# Altium PCB OTTO_ESP32.PcbDoc
Units mil, origin at the board's own origin, x right, y up, seen from the top; angles counter-clockwise.
Board outline 2257.6 x 1417.32 mil, 2 copper layers (Top1, Bottom2), stack 40.202 mil thick; 51 components, 58 nets, 224 pads, 80 vias.
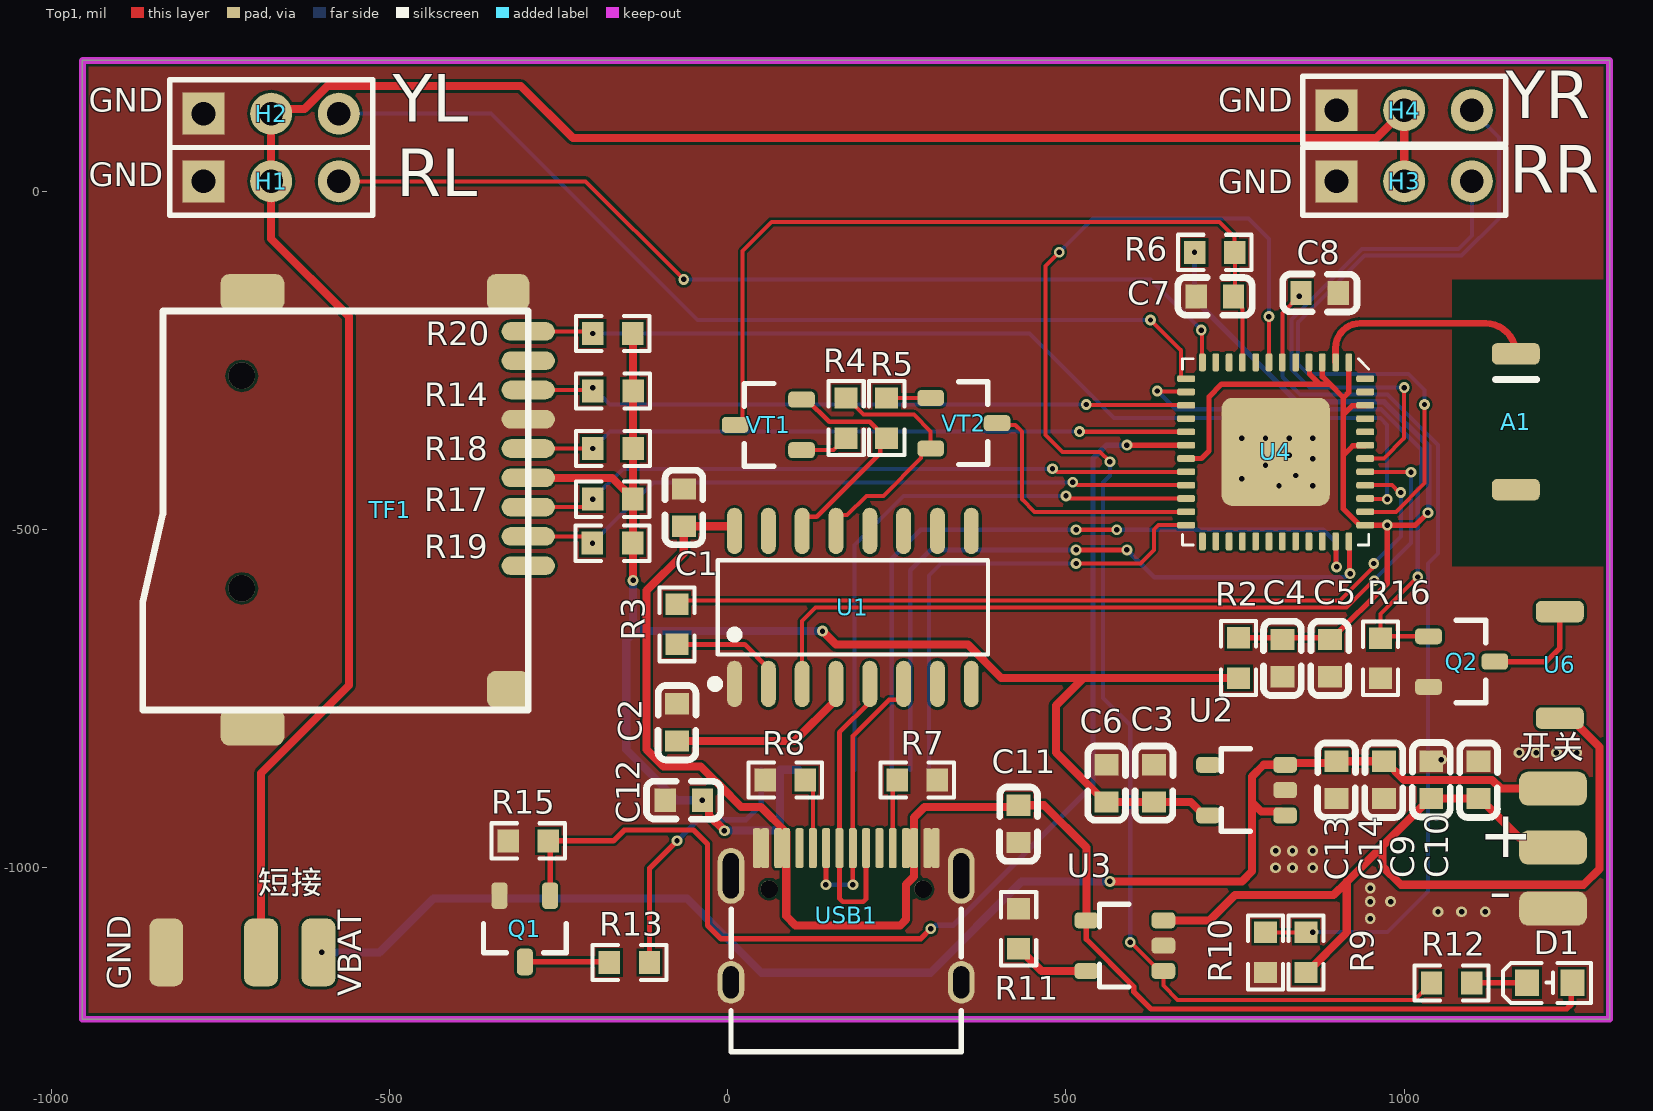
[diagram p0: Top1 view]
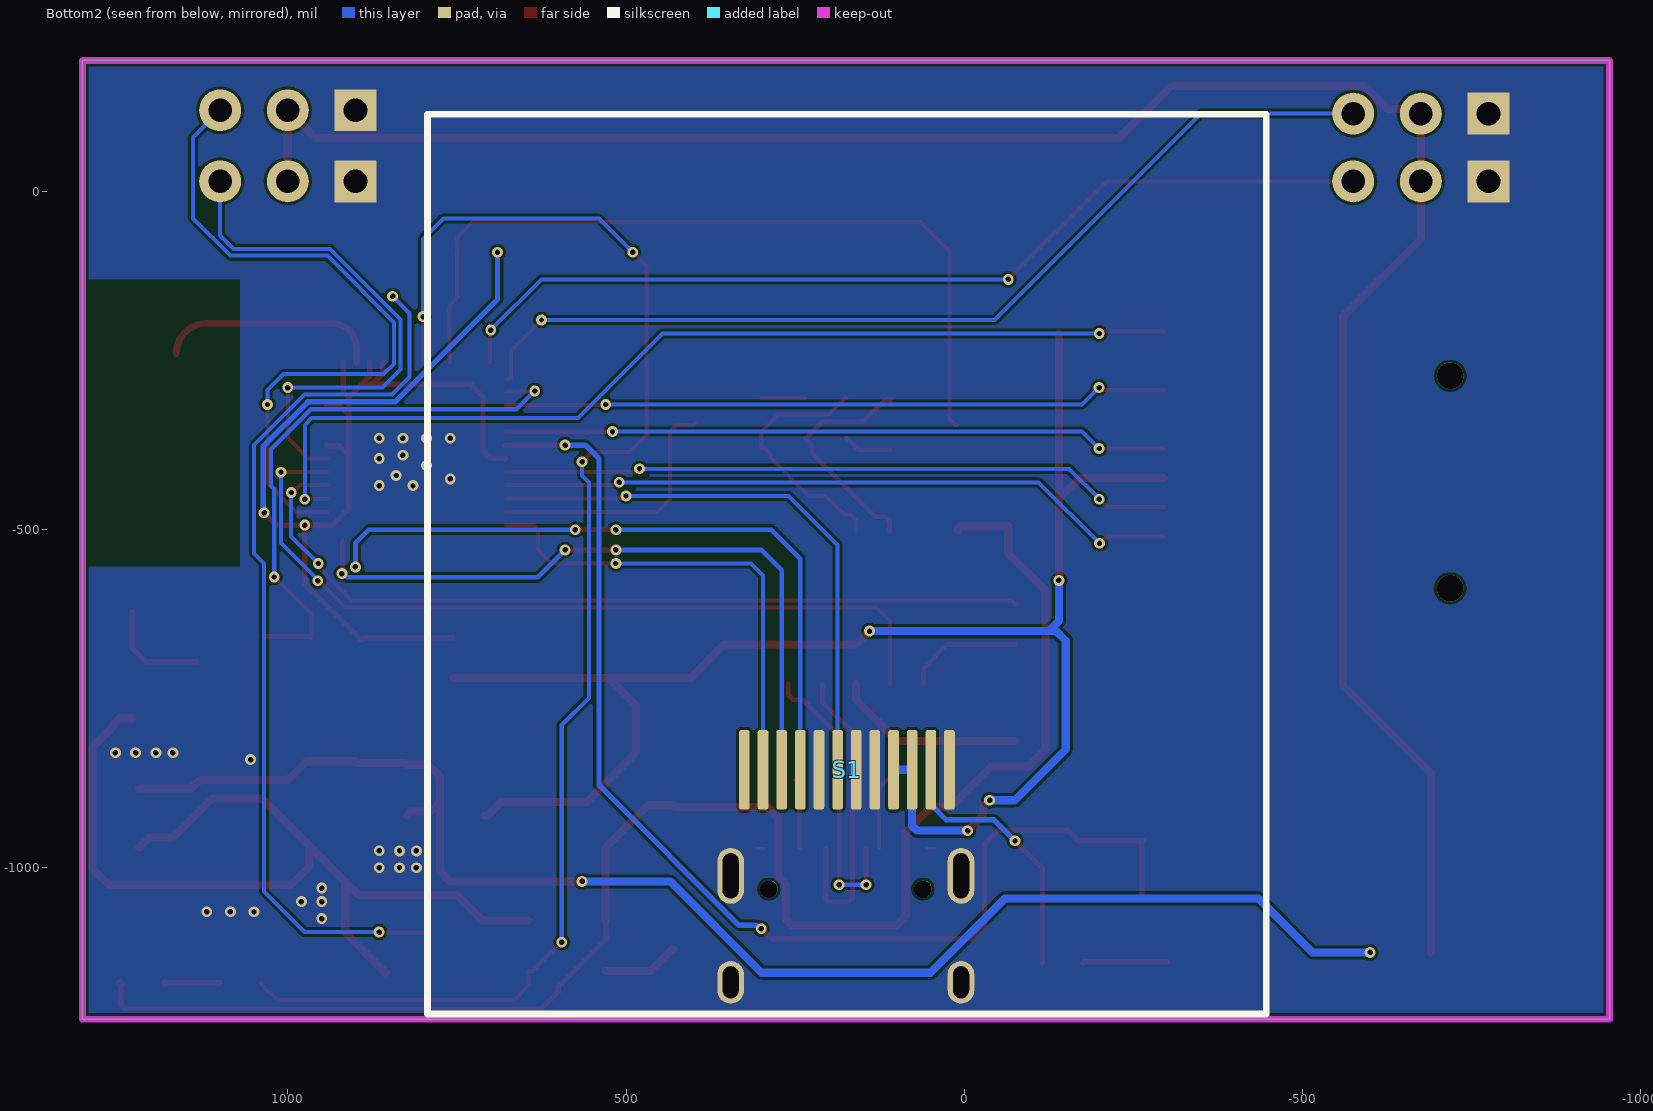
[diagram p1: Bottom2 view, seen from below]
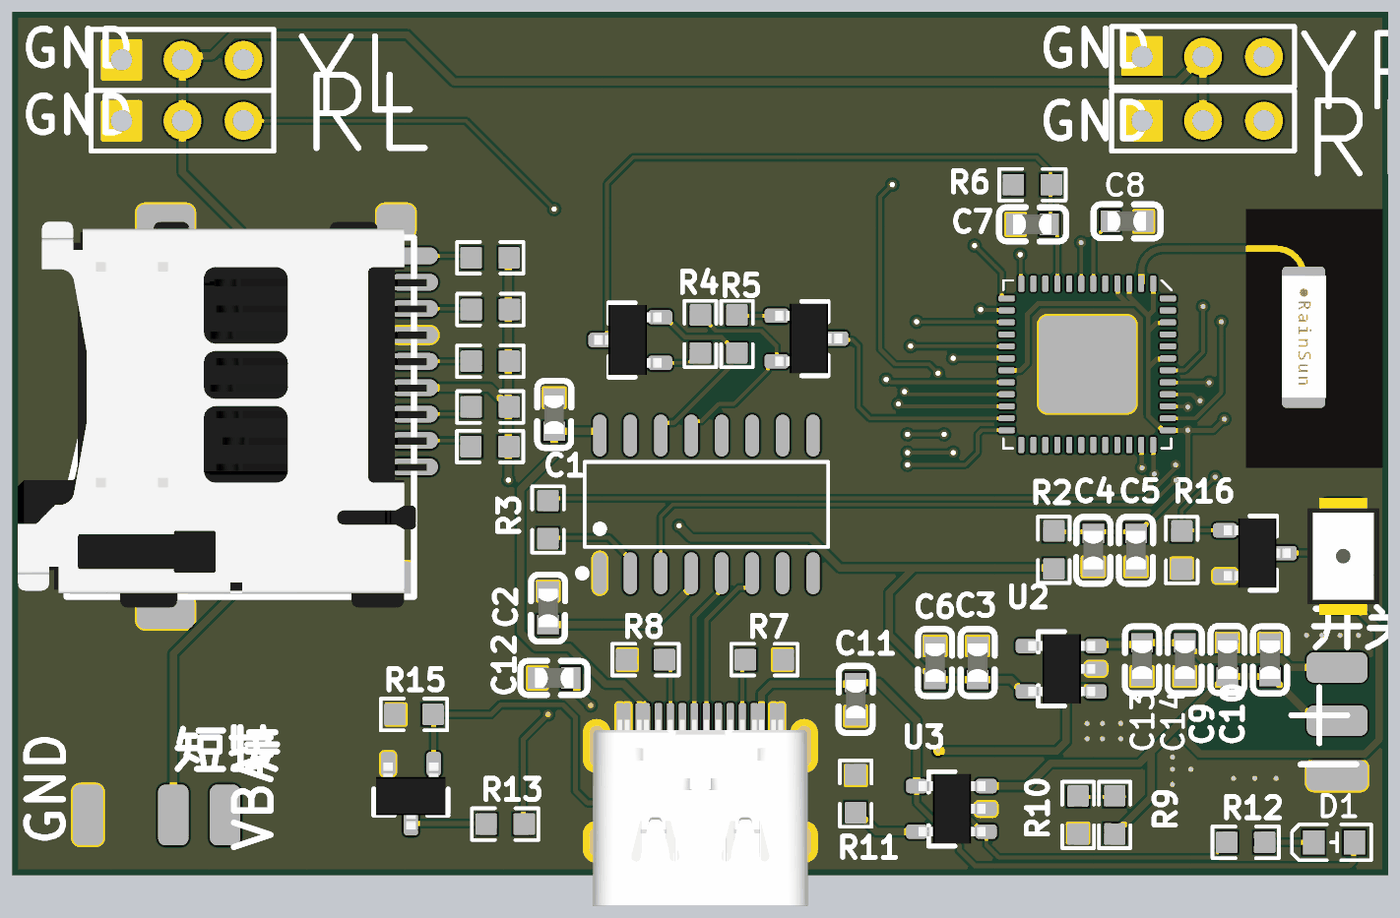
[diagram p2: 3D render of the assembled board from above, using the file's embedded part models]

## Layer stack, top to bottom
Top Solder: solder mask 0.4, Solder Resist, Dk 3.5
Top1: signal copper 1.4
Dielectric 1: core 37.4016, FR-4, Dk 4.2
Bottom2: signal copper 1.4
Bottom Solder: solder mask 0.4, Solder Resist, Dk 3.5

## Board outline
-954.01,-1223.65 -954.01,193.67 1303.59,193.67 1303.59,-1223.65

## Design rules (kind name [scope] priority, off if disabled: settings)
Clearance [All] p1: gap=4 ignorepadtopadclearanceinfootprint=FALSE
ComponentClearance [All] p1: gap=0 collisioncheckmode=3 verticalgap=0 showdistances=FALSE
DiffPairsRouting [All] p1: maxlimit=9 minlimit=9 mostfreqgap=9 toplayer_minwidth=4 toplayer_maxwidth=4 toplayer_prefwidth=4 bottomlayer_minwidth=4 bottomlayer_maxwidth=4 bottomlayer_prefwidth=4 maxuncoupledlength=500
FanoutControl Fanout_BGA [All] p1: bgadir=Out bgaviamode=Centered fanoutstyle=Auto fanoutdirection=Alternating viagrid=1 // Fanout_BGA (Default Rule)
HoleSize [All] p1: absolutevalues=TRUE maxlimit=10000 minlimit=8 maxpercent=80.000 minpercent=20.000
MinimumSolderMaskSliver [All] p1 off: minsoldermaskwidth=2
PlaneClearance [All] p1: clearance=8
PlaneConnect [All] p1: planeconnectstyle=Direct reliefexpansion=20 reliefentries=4 reliefconductorwidth=10 reliefairgap=10
PolygonConnect [All] p1: connectstyle=Direct reliefconductorwidth=10 reliefentries=4 polygonreliefangle="90 Angle" airgapwidth=10
RoutingVias [All] p1: holewidth=8 width=16 viastyle="Through Hole" minholewidth=6 minwidth=12 maxholewidth=28 maxwidth=50
SilkToBoardRegionClearance [All] p1 off:
SilkToSilkClearance [All] p1: silktosilkclearance=0
SilkToSolderMaskClearance [IsPad] p1: minsilkscreentomaskgap=0 clearancetoexposedcopper=TRUE
SolderMaskExpansion [All] p1: expansion=3 istentingtop=FALSE
Width [All] p1: maxlimit=10000 minlimit=4 preferedwidth=4
20 further rules are at their usual default settings.

## Components (designator, comment, footprint, x,y, rotation, side; value= is the part's Value field where it differs from the comment)
A1 "RAINSUN" ANT-Rainsun-AN5120 1165,-340 r270 top
C1 "0.1uF" C0603 -65,-467.44 r270 top value=0.1u
C2 "0.1uF" C0603 -75,-785 r90 top value=0.1u
C3 "0.1uF" C0603 630,-875 r270 top value=0.1u
C4 "10uF" C0603 820,-690 r90 top value=0.1u
C5 "0.1uF" C0603 890,-690 r90 top value=0.1u
C6 "10uF" C0603 560,-875 r270 top value=0.1u
C7 "1uF" C0603 720,-155 r180 top value=0.1u
C8 "0.1uF" C0603 875,-150 r180 top value=0.1u
C9 "4.7UF" C0603 1040,-870 r270 top
C10 "104" C0603 1110,-870 r90 top
C11 "4.7UF" C0603 430,-935 r90 top
C12 "0.1uF" C0603 -65,-900 r0 top value=0.1u
C13 "0.1uF" C0603 900,-870 r90 top value=0.1u
C14 "10uF" C0603 970,-870 r90 top value=0.1u
D1 "red" LED0603 1215,-1170 r180 top
H1 "GP26-2520WV-3P" PIN2.54_1*3 -675,15 r0 top
H2 "GP26-2520WV-3P" PIN2.54_1*3 -675,115 r0 top
H3 "GP26-2520WV-3P" PIN2.54_1*3 1000,15 r0 top
H4 "GP26-2520WV-3P" PIN2.54_1*3 1000,120 r0 top
Q1 "AO3400A" SOT23-3 -300,-1090 r270 top
Q2 "AO3400A" SOT23-3 1085,-695 r0 top
R2 "0R" R0603 755,-689.65 r90 top value=22R
R3 "200R" R0603 -75,-640 r270 top value=22R
R4 "12K" R0603 175,-335 r270 top value=22R
R5 "12K" R0603 235,-335 r90 top value=22R
R6 "10K" R0603 720,-90 r0 top value=22R
R7 "5.1K" R0603 280,-870 r0 top value=22R
R8 "5.1K" R0603 85,-870 r180 top value=22R
R9 "100K" R0603 855,-1125 r270 top value=22R
R10 "100K" R0603 795,-1125 r90 top value=22R
R11 "2K" R0603 430,-1090 r270 top
R12 "1K" R0603 1070,-1170 r0 top
R13 "10R" R0603 -145.34,-1140 r0 top value=22R
R14 "10K" R0603 -169.65,-295 r180 top value=22R
R15 "10K" R0603 -295,-960 r0 top value=22R
R16 "10K" R0603 965,-690 r90 top value=22R
R17 "10K" R0603 -170,-455 r180 top value=22R
R18 "10K" R0603 -169.65,-380 r180 top value=22R
R19 "10K" R0603 -170.34,-520 r180 top value=22R
R20 "10K" R0603 -170,-210 r180 top value=22R
S1 "LCD-240x240" LCD-240x240-FlUSH-154 173.45,-545.94 r180 bottom locked
TF1 "TF" TF-SOCKET -623,-733.69 r180 top
U1 "CH340C" SOP-16_L10.0-W3.9-P1.27-LS6.0-BL 185,-615 r0 top
U2 "XC6210B332MR 3.3" SOT23-5 765,-885 r180 top
U3 "MCP73831" SOT23-5 585,-1115 r180 top
U4 "ESP32_SIP" QFN-48_7X7 810,-385 r270 top
U6 "DET402" DET402 1230,-700 r90 top
USB1 "Type-C" Type-C-TOP 175,-1070 r270 top locked
VT1 "S8050" SOT23-3 60,-345 r180 top
VT2 "S8050" SOT23-3 349.06,-342.6 r0 top

## Footprints (in the part's own frame and the unit in brackets; to place one, negate y for a bottom-side part, rotate by r counter-clockwise, add the part's x,y. Pads: shape width x height; smd on the part's side, far side on the other; paste and mask are expansions set on the pad)
ANT-Rainsun-AN5120 [mm] "选择焊盘"
  rrect50% 0.8x1.8 smd: 1(-2.54,0) ""(2.563,0)
  silkscreen extent -1.57,-0.76 -1.57,0.79, body extent -2.57,-0.91 2.54,0.94, height 1.32
C0603 [mm]
  rect 0.8x0.9 smd: 1(-0.7,0) 2(0.7,0)
  silkscreen extent -1.41,-0.71 1.39,0.72, body extent -0.8,-0.41 0.8,0.41, height 0.9
DET402 [mm]
  rrect50% 0.8x1.8 smd: 1(-2,0) 2(2,0)
  body extent -2.45,-1.5 2.44,1.5, height 2.03
LCD-240x240-FlUSH-154 [mm]
  rrect50% 0.4x3 smd: 1(3.851,-7.85) 2(3.151,-7.85) 3(2.451,-7.85) 4(1.751,-7.85) 5(1.051,-7.85) 6(0.351,-7.85) 7(-0.349,-7.85) 8(-1.049,-7.85) 9(-1.749,-7.85) 10(-2.449,-7.85) 11(-3.149,-7.85) 12(-3.849,-7.85)
  silkscreen extent -15.75,-17.02 15.75,16.76, body extent -15.7,-17.02 15.7,16.76
LED0603 [mm]
  rect 0.9x1 smd: 1(-0.85,0) 2(0.85,0)
  silkscreen extent -1.55,-0.75 1.75,0.75, body extent -0.84,-0.37 0.81,0.36, height 0.68
PIN2.54_1*3 [mil]
  rect 62x62 hole 35: 1(-100,0)
  round 62 hole 35: 2(0,0) 3(100,0)
  silkscreen extent -150,-50 150,50
QFN-48_7X7 [mm]
  rrect50% 0.675x0.25 smd: 1(-3.363,2.75) 2(-3.363,2.25) 3(-3.363,1.75) 4(-3.363,1.25) 5(-3.363,0.75) 6(-3.363,0.25) 7(-3.363,-0.25) 8(-3.363,-0.75) 9(-3.363,-1.25) 10(-3.363,-1.75) 11(-3.363,-2.25) 12(-3.363,-2.75) 25(3.363,-2.75) 26(3.363,-2.25) 27(3.363,-1.75) 28(3.363,-1.25) 29(3.363,-0.75) 30(3.363,-0.25) 31(3.363,0.25) 32(3.363,0.75) 33(3.363,1.25) 34(3.363,1.75) 35(3.363,2.25) 36(3.363,2.75)
  rrect50% 0.25x0.675 smd: 13(-2.75,-3.363) 14(-2.25,-3.363) 15(-1.75,-3.363) 16(-1.25,-3.363) 17(-0.75,-3.363) 18(-0.25,-3.363) 19(0.25,-3.363) 20(0.75,-3.363) 21(1.25,-3.363) 22(1.75,-3.363) 23(2.25,-3.363) 24(2.75,-3.363) 37(2.75,3.363) 38(2.25,3.363) 39(1.75,3.363) 40(1.25,3.363) 41(0.75,3.363) 42(0.25,3.363) 43(-0.25,3.363) 44(-0.75,3.363) 45(-1.25,3.363) 46(-1.75,3.363) 47(-2.25,3.363) 48(-2.75,3.363)
  rrect20% 4.064x4.064 smd: 49(0,0)
  silkscreen extent -3.5,-3.5 3.5,3.5, body extent -3.5,-3.5 3.5,3.5, height 1
R0603 [mil]
  rect 31.75x34.02 smd: 1(-29.66,0) 2(29.65,0)
  silkscreen extent -55,-26 55,26, body extent -31,-17 31,17, height 19
SOP-16_L10.0-W3.9-P1.27-LS6.0-BL [mm]
  oval 0.56x1.745 smd: 1(-4.445,-2.873) 2(-3.175,-2.873) 3(-1.905,-2.873) 4(-0.635,-2.873) 5(0.635,-2.873) 6(1.905,-2.873) 7(3.175,-2.873) 8(4.445,-2.873) 9(4.445,2.873) 10(3.175,2.873) 11(1.905,2.873) 12(0.635,2.873) 13(-0.635,2.873) 14(-1.905,2.873) 15(-3.175,2.873) 16(-4.445,2.873)
  silkscreen extent -5.33,-3.02 5.08,1.77, body extent -5.02,-3.12 4.97,3.11, height 1.58
SOT23-3 [mm] "SOT23, 3-Leads, Body 3.1x3.0mm (max), Pitch 0.95mm, IPC Medium Density"
  rrect50% 1x0.6 smd: 1(-1.246,0.95) 2(-1.246,-0.95) 3(1.246,0)
  silkscreen extent -0.2,-1.55 0.9,1.55, body extent -1.3,-1.45 1.5,1.45, height 1.2
SOT23-5 [mm] "SOT23, 3-Leads, Body 3.1x3.0mm (max), Pitch 0.95mm, IPC Medium Density"
  rrect50% 0.889x0.6 smd: 1(-1.5,0.95) 2(-1.5,0) 3(-1.5,-0.95) 4(1.396,-0.95) 5(1.396,0.95)
  silkscreen extent -0.2,-1.55 0.9,1.55, body extent -1.48,-1.45 1.32,1.45, height 1.2
TF-SOCKET [mm]
  oval 2x0.7 smd: 1(-8.331,-4.582) 2(-8.331,-5.682) 3(-8.331,-6.782) 4(-8.331,-7.882) 5(-8.331,-8.982) 6(-8.331,-10.082) 7(-8.331,-11.182) 8(-8.331,-12.282) 9(-8.331,-13.382)
  rrect50% 1.6x1.4 smd: 10(-7.577,0.068) 10(-7.577,-14.836)
  rrect50% 2.4x1.4 smd: 10(2.023,1.476) 10(2.023,-14.836)
  silkscreen extent -8.33,-14.15 6.15,0.84, body extent -8.87,-14.81 8.18,1.29, height 2.05
Type-C-TOP [mm]
  round 0.65 hole 0.65: 0(-0.98,2.89) 0(-0.98,-2.89)
  oval 1.6x1 hole 0.6 slot 1.2 at 0 deg: 1(2.52,4.325) 2(2.52,-4.325)
  oval 2.1x1 hole 0.6 slot 1.7 at 0 deg: 3(-1.48,-4.325) 4(-1.48,4.325)
  rrect50% 1.5x0.3 smd: A1(-2.52,-3.35) A4(-2.52,-2.55) A5(-2.52,-1.25) A6(-2.52,-0.25) A7(-2.52,0.25) A8(-2.52,1.25) A9(-2.52,2.55) A12(-2.52,3.35) B1(-2.52,3.05) B4(-2.52,2.25) B5(-2.52,1.75) B6(-2.52,0.75) B7(-2.52,-0.75) B8(-2.52,-1.75) B9(-2.52,-2.25) B12(-2.52,-3.05)
  silkscreen extent -0.22,-4.33 5.12,4.33, body extent -2.57,-4.48 5.18,4.48, height 3.26

## Part data
A1: library part ANT-Rainsun-AP5120
C1 C2 C3 C4 C5 C6 C7 C12 C13 C14: library part 电容-0402, "Capacitor"
C8: "Capacitor"
C9 C10 C11: library part cap, U=50V, 参数=Cap,0805,X7R,104K,50V,125C,±10%
  C9 C11: C=4.7UF
  C10: C=104
D1: library part LED, 参数=LED,0603,Red
H1 H2 H3 H4: BOM_JLCPCB Part Class="Extended Part", BOM_Manufacturer=GEPU(歌普), BOM_Manufacturer Part=GP26-2520WV-3P, BOM_Supplier=LCSC, BOM_Supplier Part=C2681738, Contributor=LCSC, spicePre=H, spiceSymbolName=GP26-2520WV-3P
Q1 Q2: "N-MOS"
R2 R3 R4 R5 R6 R7 R8 R9 R10 R13 R14 R15 R16 R17 R18 R19 R20: "Resistor"
S1: "显示屏"
TF1: library part TF卡座, "8脚自弹"
U1: BOM_JLCPCB Part Class="Extended Part", BOM_Manufacturer=WCH, BOM_Manufacturer Part=CH340C, BOM_Supplier=LCSC, BOM_Supplier Part=C84681, spicePre=U, spiceSymbolName=CH340C
U2: library part LP2992, "LDO"
U3: "线性充电管理控制器"
U4: library part ESP32-PICO
USB1: library part USB-Type-C-TOP
VT1 VT2: library part SMT_TRIODE_NPN, "Surface mount NPN transistor, package SOT-23"
R11: P=1/8W, R=2K, 参数=Res,0805,0R,±1%,1/8W,100ppm,155C
R12: P=1/8W, R=1K, 参数=Res,0805,0R,±1%,1/8W,100ppm,155C

## Free pads (board coordinates)
  rrect50% 50x100 smd: ""(-830,-1125) ""(-690,-1125) ""(-605,-1125)
  rrect50% 100x50 smd: ""(1219.94,-882.79) ""(1220,-1060) ""(1220,-970)

## Via types
v1: diameter 16, hole 8, Top1 to Bottom2, tented both sides, 74 vias
v2: diameter 16, hole 8, Top1 to Bottom2, 4 vias
v3: diameter 39.37, hole 39.37, Top1 to Bottom2, 2 vias

## Nets (pads, with @x,y where several pads share a name; then routed paths per layer and width w, separated by ;. In a path a pad name is that pad's centre, name@x,y a point inside that pad or via, vN(x,y) a via of type N, cw(c..) or ccw(c..) an arc to the next point about the centre after c; other vN are vias at no path point)
3V3A: C4.2 C5.2 R2.2 R6.1 U4.1 U4.3 U4.4 U4.19 U4.37 U4.43 U4.46 | length 1797
  Top1 w8: U4.19 700,-394.84 711.39,-383.45 711.39,-303.61 730,-285 875,-285 ; v1(690,-90) R6.1 ; R2.2 887.55,-660 C5.2 891.97,-662.44 975,-579.41 v1@975,-499.69 ; U4.4 860,-253.41 860,-270 875,-285 ; U4.3 878.9,-273.9 890,-285 ; U4.1 918.27,-296.73 910,-305 ; 927.22,-486.5 910,-469.28 910,-390 ; 927.25,-486.5 934.02,-493.27 U4.37 968.58,-493.27 v1@975,-499.69 ; U4.43 941.46,-376.08 923.92,-376.08 910,-390 ; U4.46 941.46,-317.02 922.98,-317.02 910,-330 ; v1(1035,-475) 1016.73,-493.27 v1(975,-493.27) v1@975,-499.69 ; 875,-285 890,-285 ; 890,-285 910,-305 ; 910,-390 910,-330 ; 910,-330 910,-305
  Bottom2 w8: v1(690,-90) 690,-159.7 841.3,-311 970.44,-311 1036,-376.56 1036,-474 v1(1035,-475)
+5: H1.2 H2.2 H3.2 H4.2 pad.@-690,-1125 | length 3187.3
  Top1 w12: pad.@-690,-1125 -690,-860.05 -560,-730.05 -560,-185 -675,-70 H1.2 H2.2 -668.02,121.98 -626,121.98 -591.98,156 -306,156 -229,79 959,79 H4.2 H3.2
BAT_DET: C8.2 R9.1 R10.2 U4.6 | length 1436.7
  Top1 w6: R10.2 R9.1 ; U4.6 819.84,-179.57 C8.2@844.71,-154.71 ; v1(845,-155) 847.45,-152.56 C8.2
  Bottom2 w6: v1(845,-155) 819.84,-180.16 819.84,-273.98 845.86,-300 975,-300 1050,-375 1050,-535 1035,-550 1035,-1035 975,-1095 v1(865,-1095)
BUZZ: Q2.1 R16.2 U4.14 | length 845
  Top1 w6: v1(635,-295) 635.71,-295.71 676.91,-295.71 U4.14 ; v1(1020,-570) 965,-625 R16.2 967.75,-657.6 Q2.1
  Bottom2 w6: v1(635,-295) 662,-322 965.89,-322 1025,-381.11 1025,-435.21 1020,-440.21 v1(1020,-570)
CHG_DET: R12.1 U3.1 U4.7 | length 2150.9
  Top1 w6: v1(490,-90) 470,-110 470,-360 495,-385 550.47,-385 v1(565,-399.53) ; v2(595,-1110) 595.96,-1110 638.37,-1152.4 U3.1 644.06,-1174.06 665,-1195 1015.35,-1195 1026.34,-1184.01 1027.47,-1184.01 1040.35,-1171.13 R12.1 ; v1(800,-185) 800.08,-185.08 U4.7 U4.7
  Bottom2 w6: v1(490,-90) 540,-40 770,-40 800,-70 v1(800,-185) ; v1(565,-399.53) 565,-420 555,-430 555,-748.65 595,-788.65 v2(595,-1110)
CP_Rx: U1.3 U4.41 | length 1214.3
  Top1 w6: U1.3 110,-635 130,-615 914.82,-615 954.21,-575.61 v1(955.61,-575.61) ; U4.41 942.62,-414.76 1009.76,-414.76 v1(1010,-415)
  Bottom2 w6: v1(955.61,-575.61) 955.61,-574.21 1010,-519.82 v1(1010,-415)
CP_Tx: R3.1 U4.40 | length 1236.6
  Top1 w6: R3.1 -69.65,-605 905,-605 953,-557 953,-551.91 v1(954.91,-550) ; U4.40 981.75,-434.21 992.53,-445 v1(995,-445)
  Bottom2 w6: v1(954.91,-550) 995,-509.91 v1(995,-445)
DTR: R4.1 U1.13 VT2.2 | length 374.9
  Top1 w6: U1.13 160,-486.05 167.41,-478.63 176.37,-478.63 205,-450 230,-450 285.62,-394.38 285.62,-388.59 294.21,-380 VT2.2 300,-355 275,-330 200.79,-330 176.13,-305.35 R4.1 R4.1@173.87,-305.35
EN: C7.1 R6.2 U4.9 VT1.3 | length 1209
  Top1 w6: VT1.3 13.13,-345 21.72,-336.41 21.72,-88.28 65,-45 726.78,-45 749.29,-67.51 749.29,-89.29 R6.2@750,-90 ; R6.2 749.66,-152.9 C7.1 760.3,-167.75 760.3,-172.75 760.79,-173.23 U4.9
FLASH_CLK: U4.31
FLASH_CS: U4.25
FLASH_SD0: U4.27
FLASH_SD1: U4.33
FLASH_SD2: U4.30
FLASH_SD3: U4.32
GND: C1.1 C2.2 C3.1 C4.1 C5.1 C6.1 C7.2 C8.1 C9.1 C10.2 C11.1 C12.1 C13.1 C14.1 H1.1 H2.1 H3.1 H4.1 pad.@1220,-1060 pad.@-830,-1125 Q1.2 Q2.2 R7.2 R8.2 R10.1 R11.1 R15.1 R16.1 S1.1 S1.5 S1.6 S1.8 TF1.6 TF1.10 U1.1 U2.2 U3.2 U4.49 USB1.1 USB1.2 USB1.3 USB1.4 USB1.A1 USB1.A12 USB1.B1 USB1.B12 | length 23.6
  Top1 w4: USB1.A1 USB1.B12 ; USB1.B1 USB1.A12
  other v1: 949.84,-1074.92 1049.92,-1064.92 1084.92,-1064.92 1119.92,-1064.92 949.92,-1049.92 979.92,-1049.92 949.84,-1029.92 809.92,-999.92 834.92,-999.92 864.92,-999.92 809.84,-974.92 834.84,-974.84 864.84,-974.76 1054.92,-839.92 1169.92,-829.92 1194.92,-829.84 1224.92,-829.92 1254.92,-829.84 814.92,-434.92 864.92,-434.92 759.92,-424.92 839.92,-419.92 794.92,-404.92 864.92,-394.92 829.92,-389.92 759.92,-364.92 794.92,-364.92 829.92,-364.92 864.92,-364.92
GPIO0: U4.23 VT2.3 | length 392.3
  Top1 w6: VT2.3 400.51,-345 425,-345 435,-355 435,-455 453.58,-473.58 U4.23
GPIO2: S1.7 U4.22 | length 854.4
  Top1 w6: v1(500,-450) 502.71,-450 506.6,-453.9 U4.22
  Bottom2 w6: S1.7 187.2,-522.8 260,-450 v1(500,-450)
GPIO4: S1.11 U4.24 | length 716
  Top1 w6: v1(515,-550) 610,-550 630,-530 630,-500 636.73,-493.27 U4.24
  Bottom2 w6: S1.11 297.44,-567.56 315,-550 v1@510,-550 ; v1@510.01,-550.01 v1(515,-550)
GPIO5: U4.34
GPIO9: U4.28
GPIO10: U4.29
GPIO12: Q1.1 R15.2 U4.18 | length 1753.9
  Top1 w6: R15.2 R15.2@-262.6,-962.75
  Top1 w8: R15.2 -168.92,-960 -152.92,-944 -51,-944 -30,-965 -30,-1085 -10,-1105 285,-1105 v1(300,-1090) ; Q1.1 R15.2@-262.6,-962.75 ; v1(590,-375) 590.08,-375.08 677.54,-375.08 U4.18
  Bottom2 w8: v1(300,-1090) 302.16,-1090 307.16,-1085 332.81,-1085 540,-877.81 540,-395 560,-375 v1(590,-375)
GPIO13: R17.2 TF1.3 U4.20 | length 998
  Top1 w6: TF1.3 -211.35,-466.69 v2(-199.65,-455) ; v1(480,-410) 482.71,-410 487.23,-414.53 U4.20
  Bottom2 w6: v2(-199.65,-455) -154.65,-410 v1(480,-410)
GPIO14: R18.2 TF1.5 U4.17 | length 983.2
  Top1 w6: TF1.5 v2(-199.39,-380.08) ; v1(520,-355) 520.24,-355.24 677.38,-355.24 U4.17
  Bottom2 w6: v2(-199.39,-380.08) -174.31,-355 v1(520,-355)
GPIO15: R19.2 TF1.2 U4.21 | length 1015.8
  Top1 w6: TF1.2 -210,-510 v1(-200,-520) ; v1(510,-430) 512.71,-430 516.92,-434.21 U4.21
  Bottom2 w6: v1(-200,-520) -110,-430 v1(510,-430)
GPIO18: S1.9 U4.35 | length 1069.2
  Top1 w7: v1(515,-500) v1(575,-500) ; U4.35 899.29,-518.09 899.29,-554.29 v1(900,-555)
  Bottom2 w7: S1.9 242.32,-542.68 285,-500 v1(515,-500) ; v1(575,-500) 880,-500 900,-520 v1(900,-555)
GPIO19: H4.3 U4.38 | length 1043.9
  Top1 w6: U4.38 987.63,-473.58 1030,-431.21 v1(1030,-315)
  Bottom2 w6: v1(1030,-315) 1030,-293.79 1006.21,-270 858.23,-270 843.23,-255 843.23,-193.41 941.64,-95 1085,-95 1140,-40 1140,80 H4.3
GPIO21: H3.3 U4.42 | length 795
  Top1 w6: U4.42 970,-394.84 1000,-364.84 v1(1000,-290)
  Bottom2 w6: v1(1000,-290) 860,-290 833.23,-263.23 833.23,-189.27 937.5,-85 1080,-85 1100,-65 H3.3
GPIO22: R20.2 TF1.9 U4.39 | length 1470.1
  Top1 w6: TF1.9 -202.8,-206.85 v1(-199.65,-210) ; U4.39 942.93,-454.45 974.45,-454.45 v1(975,-455)
  Bottom2 w6: v1(-199.65,-210) 446.21,-210 571.21,-335 964.75,-335 974.87,-345.13 974.87,-454.87 v1(975,-455)
GPIO23: S1.10 U4.36 | length 1024.9
  Top1 w7: v1(515,-530) v1(590,-530) ; U4.36 919.13,-518.25 919.13,-564.13 v1(920,-565)
  Bottom2 w7: S1.10 269.88,-560.12 300,-530 v1(515,-530) ; v1(590,-530) 630.5,-570.5 912.34,-570.5 917.84,-565 v1(920,-565)
GPIO26: R14.2 TF1.7 U4.15 | length 981.9
  Top1 w6: TF1.7 R14.2@-200.84,-293.47 ; v1(530,-315) 530.55,-315.55 677.07,-315.55 U4.15
  Bottom2 w6: v1(-199.31,-290) -174.31,-315 v1(530,-315)
GPIO27: U4.16
GPIO32: H1.3 U4.12 | length 1414.5
  Top1 w6: H1.3 -210,15 v1(-65,-130) ; v1(700,-205) 700.87,-205.87 700.87,-251.75 U4.12
  Bottom2 w6: v1(-65,-130) 625,-130 v1(700,-205)
GPIO33: H2.3 U4.13 | length 1438.3
  Top1 w6: v1(625,-190) 669.79,-234.79 669.79,-274.81 671.71,-276.73 U4.13
  Bottom2 w6: H2.3 -350,115 -45,-190 v1(625,-190)
GPIO34: U4.10
GPIO35: U4.11
LCD_LEDK: R13.2 S1.2 | length 394.7
  Top1 w8: R13.2 -115.69,-1000.69 v1(-75,-960)
  Bottom2 w8: v1(-75,-960) -44,-929 26.59,-929 49.41,-906.18 S1.2
NetA1_1: A1.1 U4.2 | length 334.1
  Top1 w10: U4.2 898.58,-231.42 cw(c935,-231.42) 935,-195 1120,-195 cw(c1120,-240) A1.1
NetC2_1: C2.1 U1.4 | length 283.7
  Top1 w12: C2.1 98.86,-812.55 160,-751.42 U1.4
NetD1_K: D1.2 R12.2 | length 81.9
  Top1 w8: R12.2 D1.2
NetQ1_3: Q1.3 R13.1 | length 125.4
  Top1 w8: Q1.3 -175.94,-1139.06 R13.1
NetQ2_3: Q2.3 U6.2 | length 158
  Top1 w8: Q2.3 1210,-695 1230,-675 U6.2
NetR3_2: R3.2 U1.2 | length 172.9
  Top1 w7: R3.2 24.89,-669.65 60,-704.76 U1.2
NetR4_2: R4.2 VT1.1 | length 73.3
  Top1 w6: VT1.1 156.12,-382.4 173.87,-364.65 R4.2
NetR5_2: R5.2 VT2.1 | length 65.1
  Top1 w6: R5.2 235.15,-305.2 VT2.1
NetR7_1: R7.1 USB1.B5 | length 103.5
  Top1 w6: USB1.B5 243.9,-876.45 R7.1
NetR8_1: R8.1 USB1.A5 | length 105.4
  Top1 w6: R8.1 125.79,-881.13 USB1.A5
NetR11_2: R11.2 U3.5 | length 113.6
  Top1 w12: R11.2 431.13,-1119.65 463.88,-1152.4 U3.5
RTS: R5.1 U1.14 VT1.2 | length 347.1
  Top1 w7: VT1.2 116.93,-307.6 149.83,-340.5 209.71,-340.5 233.87,-364.65 R5.1 225.46,-374.2 225.46,-386.93 131.52,-480.86 116.95,-480.86 110,-487.81 U1.14
SENSOR_VN: U4.8
SENSOR_VP: U4.5
USB-PWR-DM: U1.6 USB1.A7 USB1.B7 | length 431.1
  Top1 w7: v1(145,-1025) 145.24,-1024.76 145.24,-971.02 USB1.B7 ; v1(185,-1025) 184.92,-1024.92 184.92,-970.87 USB1.A7 184.84,-805.16 238.48,-751.52 253.05,-751.52 260,-744.57 U1.6
  Bottom2 w7: v1(145,-1025) v1(185,-1025)
USB-PWR-DP: U1.5 USB1.A6 USB1.B6 | length 453.8
  Top1 w7: USB1.B6 204.53,-1045.9 200.43,-1050 170,-1050 165.16,-1045.16 USB1.A6 165.16,-799.84 210,-755 U1.5
VBAT: C9.2 C10.1 pad.@1220,-970 R9.2 U3.3 U6.1 | length 1469.8
  Top1 w12: U3.3 712.4,-1077.6 750,-1040 895.59,-1040 915,-1020.59 ; R9.2 856.13,-1154.65 915,-1095.79 915,-1020.59 ; pad.@1220,-970 1205.01,-955.01 1169.43,-955.01 1111.97,-897.55 C10.1 C9.2 1038.03,-897.55 967.79,-967.79 ; U6.1 1248.67,-778.74 1258.28,-788.35 1258.28,-790.81 1288.59,-821.12 1288.59,-1001.41 1265,-1025 995,-1025 967.79,-997.79 967.79,-967.79 ; 915,-1020.59 967.79,-967.79
VBAT_IN: C13.2 C14.2 pad.@1219.94,-882.79 pad.@-605,-1125 U2.1 U2.3 | length 2184
  Top1 w12: v2(565,-1020) 760,-1020 775,-1005 775,-902.97 ; U2.1 818.24,-916.59 788.62,-916.59 775,-902.97 ; pad.@1219.94,-882.79 1142.84,-882.79 1130.05,-870 999.52,-870 971.97,-842.44 C14.2 C13.2 897.42,-845.02 826.63,-845.02 U2.3 792.4,-847.6 774.97,-865.03 774.97,-874.97 775,-902.97
  Bottom2 w12: v1(-600,-1125) -515,-1125 -435,-1045 -60,-1045 50,-1155 299.46,-1155 434.46,-1020 v2(565,-1020)
VCC_3V3: C3.2 C6.2 C12.2 R2.1 R14.1 R17.1 R18.1 R19.1 R20.1 S1.3 S1.4 TF1.4 U2.5 | length 2503.2
  Top1 w12: TF1.4 -170.83,-423.39 -140.34,-453.87 R17.1 ; R20.1 -140,-210.35 R14.1 R18.1 v1(-140,-575) ; v1(-37.44,-900) -27.7,-909.75 -27.7,-922.3 v1(-5,-945) ; v1(140,-650) 160,-670 354.97,-670 404.28,-719.31 525.69,-719.31 ; U2.5 704.37,-922.4 684.52,-902.55 C3.2 C6.2 558.03,-902.55 485,-829.52 485,-760 525.69,-719.31 ; R2.1 525.69,-719.31
  Bottom2 w12: v1(-140,-575) -140,-635 -125,-650 ; v1(-37.44,-900) -75,-900 -150,-825 -150,-664.16 -135.84,-650 -125,-650 ; v1(-5,-945) 69.94,-945 76.97,-937.97 S1.3 S1.4 ; v1(140,-650) -125,-650
VUSB: C1.2 C11.2 D1.1 U1.16 U3.4 USB1.A4 USB1.A9 USB1.B4 USB1.B9 | length 2378.2
  Top1 w8: U3.4 530.06,-1105.49 600,-1175.43 600,-1182.97 625.68,-1208.65 1240,-1208.65 1247.03,-1201.62 D1.1@1247.03,-1171.43
  Top1 w12: U1.16 10,-499.64 5.36,-495 C1.2 -65,-535 -120,-590 -120,-825 -95,-850 -40,-850 -17.72,-872.28 -17.55,-872.28 -11.7,-878.14 -11.7,-878.3 20,-910 49.06,-910 86.42,-947.35 USB1.B9 86.42,-1071.42 100,-1085 255,-1085 263.49,-1076.51 263.49,-1024.47 275.3,-1012.66 275.3,-970.88 USB1.A9 275.39,-925.39 290.79,-910 427.45,-910 C11.2 467.45,-907.44 530.06,-970.06 U3.4 ; D1.1@1247.03,-1171.43 D1.1
pads on no net: A1. S1.12 TF1.1 TF1.8 U1.7 U1.8 U1.9 U1.10 U1.11 U1.12 U1.15 U2.4 U4.26 U4.44 U4.45 U4.47 U4.48 USB1.0 USB1.A8 USB1.B8
copper on no net:
  other v3: -718.39,-586.77 -718.39,-272.6

## Polygon pours and split planes (outlines as drawn)
GND on Bottom2 "GND_L02_P001" (solid, remove dead copper, pour order 1): -1005,610 -1505,-1625 2225,-1510 2100,460
GND on Top1 "GND_L01_P000" (solid, remove dead copper, pour order 0): -1930,645 -1495,-1705 2065,-1310 2100,460

## Keep-outs
Keep-Out Layer:
  lines w6: -954.01,-1223.65 1303.59,-1223.65 1303.59,193.67 -954.01,193.67 -954.01,-1223.65
  lines w10: -954.01,-1223.65 1303.59,-1223.65 1303.59,193.67 -954.01,193.67 -954.01,-1223.65

## Other copper
Top1:
  pour cut-out: 1070,-130 1070,-555 1295,-555 1295,-130
Bottom2:
  pour cut-out: 1070,-130 1070,-555 1295,-555 1295,-130

## Silkscreen, mask and mechanical layers (free items; w line width, h text height)
Top Overlay:
  text "GND" at -945,105.67 h60
  text "GND" at 725,105.67 h60
  text "YR" at 1150,85 h120
  text "YL" at -495,80 h120
  text "GND" at -945,-4.33 h60
  text "GND" at 725,-14.33 h60
  text "RR" at 1155,-25 h120
  text "RL" at -490,-30 h120
  text "开关" at 1170.06,-849.78 h60
  text "+" at 1110,-1007.44 h120
  text "短接" at -695,-1049.78 h60
  text "-" at 1125,-1088.11 h120
  text "GND" at -870.67,-1180 h60 r90
  text "VBAT" at -530,-1189.94 h60 r90
Top Solder:
  rectangle: 1070,-555 1295,-130
Bottom Solder:
  rectangle: 1070,-555 1295,-130
Mechanical 1:
  lines w0.89: 174.79,-1223.65 174.79,193.67 ; -954.01,-1223.65 -954.01,193.67 ; -954.01,-1223.65 1303.59,-1223.65 ; -954.01,-1223.65 -954.01,193.67 ; -954.01,-1223.65 1303.59,-1223.65 ; -954.01,193.67 1303.59,193.67 ; -954.01,193.67 1303.59,193.67 ; 1303.59,-1223.65 1303.59,193.67 ; 1303.59,-1223.65 1303.59,193.67
  lines w6: -954.01,-1223.65 1303.59,-1223.65 1303.59,193.67 -954.01,193.67 -954.01,-1223.65